# Altium PCB ESCBackerBoard.PcbDoc
Units mil, origin at the board's own origin, x right, y up, seen from the top; angles counter-clockwise.
Board outline 5998.11 x 4000 mil, 2 copper layers (Top Layer, Bottom Layer); 29 components, 6 nets, 287 pads, 62 vias.
Unrouted connection lines stored in the file: 146.
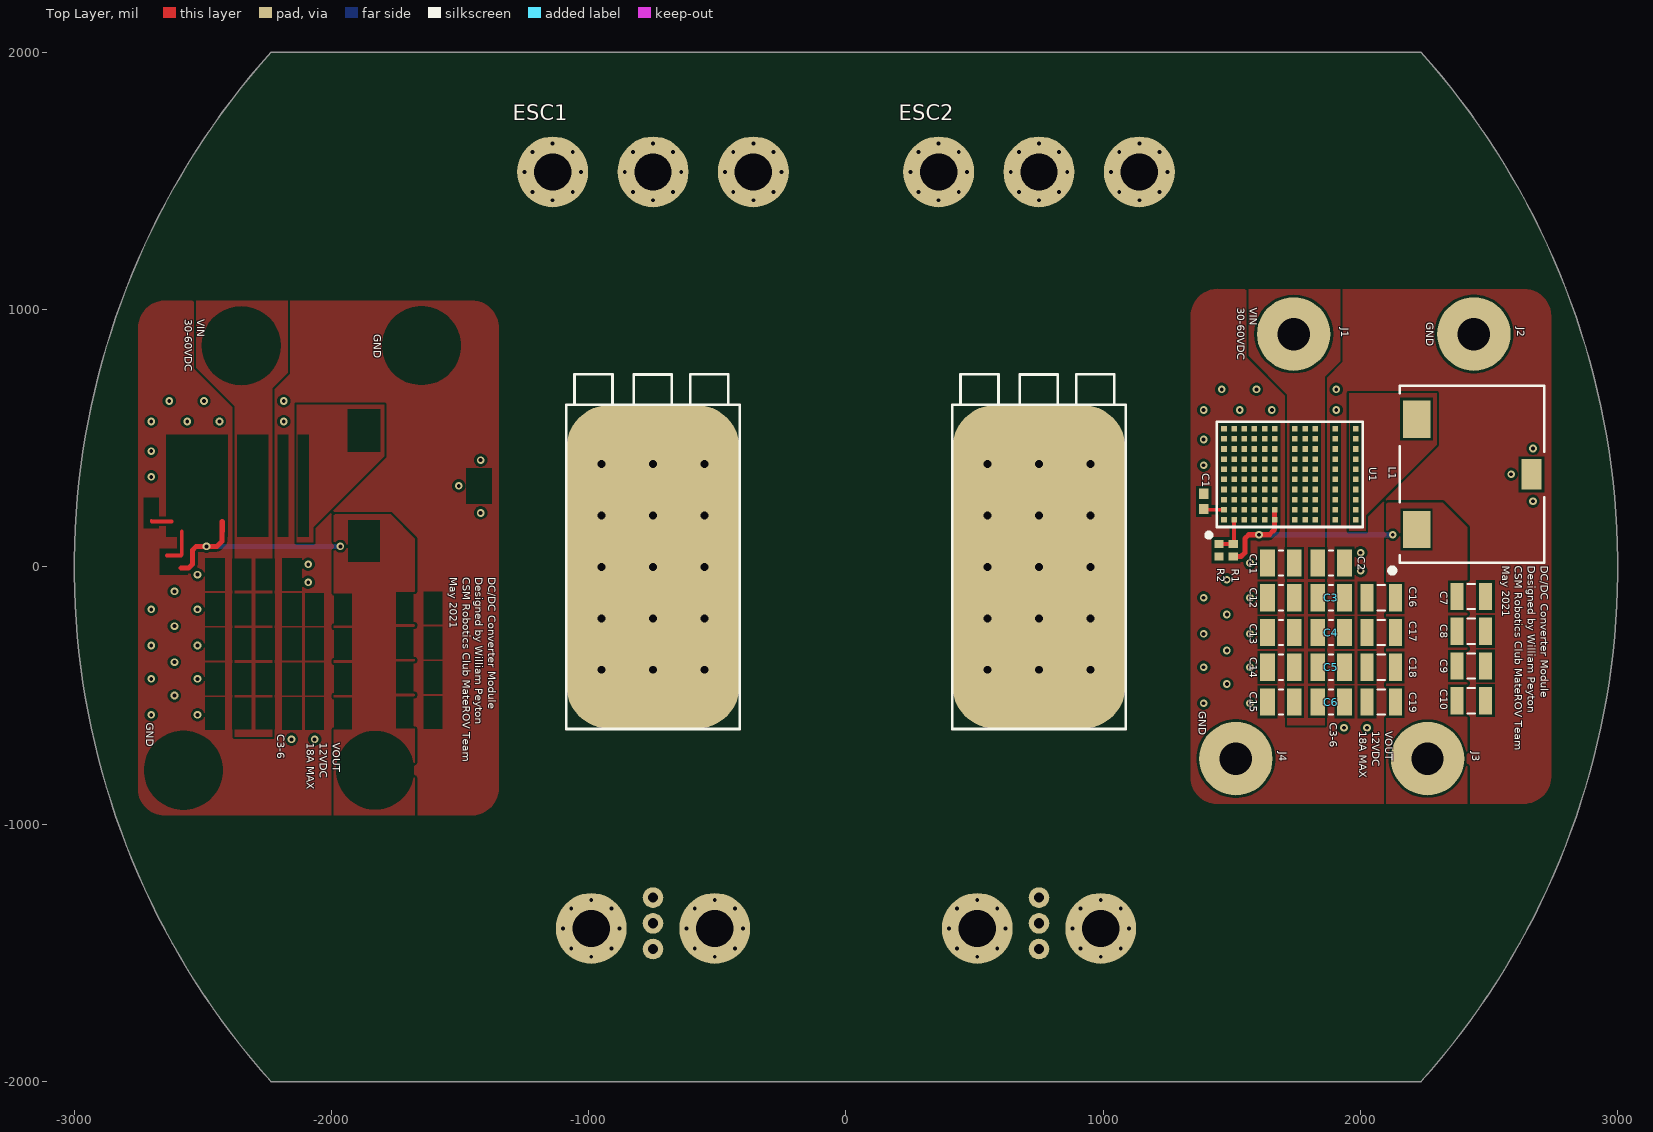
[diagram p0: Top Layer view]
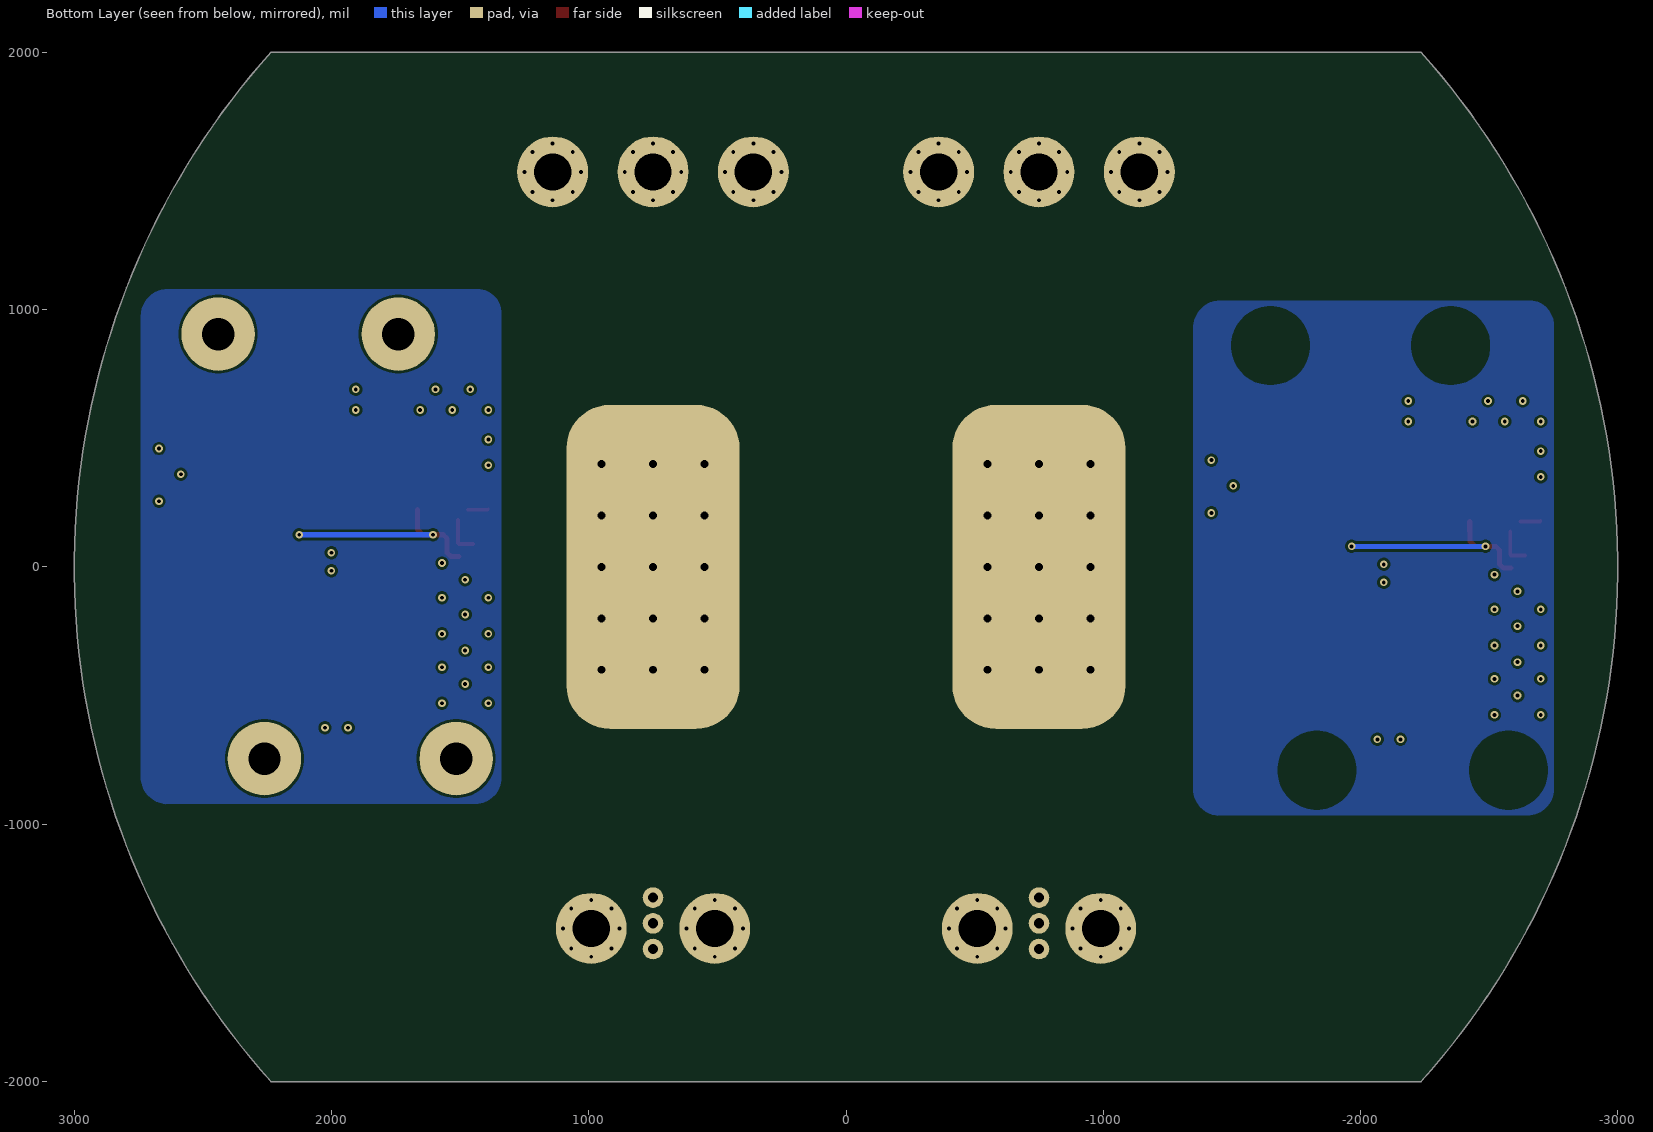
[diagram p1: Bottom Layer view, seen from below]

## Layer stack, top to bottom
Top Solder: solder mask 0.4, Solder Resist, Dk 3.5
Top Layer: signal copper 1.4
Dielectric 1: dielectric 12.6, FR-4, Dk 4.8
Bottom Layer: signal copper 1.4
Bottom Solder: solder mask 0.4, Solder Resist, Dk 3.5

## Board outline
-2235,-2000 cw(c0,0) -2235,2000 2235,2000 cw(c0,0) 2235,-2000

## Design rules (kind name [scope] priority, off if disabled: settings)
Clearance [All] p1: gap=10 ignorepadtopadclearanceinfootprint=FALSE except(0: Arc-Hole Track-Hole SMDPad-Hole THPad-Hole Via-Hole Fill-Hole Poly-Hole Region-Hole Text-Hole)
PolygonConnect [All] p1: connectstyle=Relief reliefconductorwidth=10 reliefentries=4 polygonreliefangle="90 Angle" airgapwidth=10
RoutingVias [All] p1: holewidth=28 width=50 viastyle="Through Hole" minholewidth=28 minwidth=50 maxholewidth=28 maxwidth=50
SolderMaskExpansion [All] p1: expansion=4 istentingtop=FALSE
Width [All] p1: maxlimit=10 minlimit=10 preferedwidth=10
30 further rules are at their usual default settings.

## Classes and differential pairs
component class Top: ESC1 ESC2
component class DC/DC2: C1 C2 C3 C4 C5 C6 C7 C8 C9 C10 C11 C12 C13 C14 C15 C16 C17 C18 C19 J1 J2 J3 J4 L1 R1 R2 U1

## Components (designator, comment, footprint, x,y, rotation, side; value= is the part's Value field where it differs from the comment)
C1 "4.7nF 100V" "C1608 Generic" 1390,255 r90 top
C2 "2.2uF 100V" HMK325B7225MM-P 1885,15 r0 top
C3 "2.2uF 100V" HMK325B7225MM-P 1885,-120 r0 top
C4 "2.2uF 100V" HMK325B7225MM-P 1885,-255 r0 top
C5 "2.2uF 100V" HMK325B7225MM-P 1885,-390 r0 top
C6 "2.2uF 100V" HMK325B7225MM-P 1885,-525 r0 top
C7 "10uF 25V" C1210C106M3RACTU 2430,-115 r180 top
C8 "10uF 25V" C1210C106M3RACTU 2430,-250 r180 top
C9 "10uF 25V" C1210C106M3RACTU 2430,-385 r180 top
C10 "10uF 25V" C1210C106M3RACTU 2430,-520 r180 top
C11 "2.2uF 100V" HMK325B7225MM-P 1690,15 r180 top
C12 "2.2uF 100V" HMK325B7225MM-P 1690,-120 r180 top
C13 "2.2uF 100V" HMK325B7225MM-P 1690,-255 r180 top
C14 "2.2uF 100V" HMK325B7225MM-P 1690,-390 r180 top
C15 "2.2uF 100V" HMK325B7225MM-P 1690,-525 r180 top
C16 "10uF 25V" C1210C106M3RACTU 2080,-120 r0 top
C17 "10uF 25V" C1210C106M3RACTU 2080,-255 r0 top
C18 "10uF 25V" C1210C106M3RACTU 2080,-390 r0 top
C19 "10uF 25V" C1210C106M3RACTU 2080,-525 r0 top
ESC1 "7-26V 30A" BasicESC -750,0 r90 top
ESC2 "7-26V 30A" BasicESC 750,0 r90 top
J1 "=Value" M3-Bolt-Down#1 1790,905 r270 top
J2 "=Value" M3-Bolt-Down#2 2355,905 r270 top
J3 "=Value" M3-Bolt-Down#3 2310,-1000 r270 top
J4 "=Value" M3-Bolt-Down#4 1795,-1025 r270 top
L1 "480nH" PA5120.481NLT 2625,360 r90 top
R1 "11.1kΩ" "RNCF0603 Generic" 1505,65 r90 top
R2 "1kΩ" "RNCF0603 Generic" 1450,65 r90 top
U1 "12V 18A" PI3526-00-LGIZ 1725,360 r90 top

## Footprints (in the part's own frame and the unit in brackets; to place one, negate y for a bottom-side part, rotate by r counter-clockwise, add the part's x,y. Pads: shape width x height; smd on the part's side, far side on the other; paste and mask are expansions set on the pad)
BasicESC [mil]
  round 60 hole 30 paste+0 mask+0: 1(-400,-200) 1(-400,0) 1(-400,200) 1(-200,-200) 1(-200,0) 1(-200,200) 1(0,200) 1(0,0) 1(0,-200) 1(200,-200) 1(200,0) 1(200,200) 1(400,-200) 1(400,0) 1(400,200)
  rrect50% 1259.84x673.23 all layers, no hole: 1(0,0)
  round 80 hole 40: 2(-1385,0) GND(-1285,0) SIG(-1485,0)
  round 30 hole 15 paste+0 mask+0: A(1425,-390) A(1457,-468) A(1457,-312) A(1535,-500) A(1535,-280) A(1613,-468) A(1613,-312) A(1645,-390) B(1425,0) B(1457,-78) B(1457,78) B(1535,-110) B(1535,110) B(1613,-78) B(1613,78) B(1645,0) C(1425,390) C(1457,312) C(1457,468) C(1535,280) C(1535,500) C(1613,312) C(1613,468) C(1645,390) GND(-1515,-240) GND(-1483,-318) GND(-1483,-162) GND(-1405,-350) GND(-1405,-130) GND(-1327,-318) GND(-1327,-162) GND(-1295,-240) VIN(-1515,240) VIN(-1483,162) VIN(-1483,318) VIN(-1405,130) VIN(-1405,350) VIN(-1327,162) VIN(-1327,318) VIN(-1295,240)
  round 275.59 hole 144.88: A(1535,-390) B(1535,0) C(1535,390) GND(-1405,-240) VIN(-1405,240)
  silkscreen extent -630,-337 748,337, body extent -1535,-533 1675,533, height 336
C1210C106M3RACTU [mm] "KEMET CAP CER 10UF 25V X7R 1210"
  rect 1.3x2.7 smd: 1(-1.4,0) 2(1.4,0)
  silkscreen extent -0.35,-1.25 0.35,1.25, body extent -1.7,-1.35 1.7,1.35, height 1.25
"C1608 Generic" [mm]
  rect 1x0.95 smd: 1(-0.75,0) 2(0.75,0)
  body extent -0.85,-0.45 0.85,0.45, height 0.9
HMK325B7225MM-P [mm] "Taiyo Yuden CAP CER 2.2UF 100V X7R 1210"
  rect 1.45x2.7 smd: 1(-1.325,0) 2(1.325,0)
  silkscreen extent -0.2,-1.25 0.2,1.25, body extent -1.7,-1.35 1.7,1.35, height 2.5
M3-Bolt-Down#1 [mm]
  round 7.25 hole 3.2: 1(0,-1.27)
M3-Bolt-Down#2 [mm]
  round 7.25 hole 3.2: 1(0,2.159)
M3-Bolt-Down#3 [mm]
  round 7.25 hole 3.2: 1(-6.477,-1.27)
M3-Bolt-Down#4 [mm]
  round 7.25 hole 3.2: 1(-7.112,-7.112)
PA5120.481NLT [mm] "Pulse FIXED IND 480NH 32A 1.7MOHM SMD"
  rect 3.7x2.7 smd: 1(-5.45,10.35) 2(5.45,10.35)
  rect 3x2 smd: 3(0,-1)
  silkscreen extent -9.75,-2.25 8.75,13, body extent -8.65,-2.15 8.65,11.85, height 6.5
PI3526-00-LGIZ [mm] "Vicor Power DC DC CONVERTER 12V 18A"
  rect 0.55x0.55 smd: A1(-4.5,6.5) A2(-4.5,5.5) A3(-4.5,4.5) A4(-4.5,3.5) A5(-4.5,2.5) B1(-3.5,6.5) BLOCK1(-4.5,-6.5) BLOCK1(-3.5,-6.5) BLOCK1(-2.5,-6.5) BLOCK1(-1.5,-6.5) BLOCK1(-0.5,-6.5) BLOCK1(0.5,-6.5) BLOCK1(1.5,-6.5) BLOCK1(2.5,-6.5) BLOCK1(3.5,-6.5) BLOCK1(4.5,-6.5) BLOCK2(-4.5,-4.5) BLOCK2(-3.5,-4.5) BLOCK2(-3.5,2.5) BLOCK2(-2.5,3.5) BLOCK2(-2.5,1.5) BLOCK2(-2.5,2.5) BLOCK2(-2.5,-4.5) BLOCK2(-1.5,1.5) BLOCK2(-1.5,2.5) BLOCK2(-1.5,3.5) BLOCK2(-1.5,-4.5) BLOCK2(-0.5,2.5) BLOCK2(-0.5,3.5) BLOCK2(-0.5,1.5) BLOCK2(-0.5,-4.5) BLOCK2(0.5,5.5) BLOCK2(0.5,4.5) BLOCK2(0.5,2.5) BLOCK2(0.5,3.5) BLOCK2(0.5,1.5) BLOCK2(0.5,-4.5) BLOCK2(1.5,4.5) BLOCK2(1.5,5.5) BLOCK2(1.5,1.5) BLOCK2(1.5,2.5) BLOCK2(1.5,3.5) BLOCK2(1.5,-4.5) BLOCK2(2.5,3.5) BLOCK2(2.5,4.5) BLOCK2(2.5,5.5) BLOCK2(2.5,1.5) BLOCK2(2.5,2.5) BLOCK2(2.5,-4.5) BLOCK2(3.5,-4.5) BLOCK2(3.5,1.5) BLOCK2(3.5,2.5) BLOCK2(3.5,3.5) BLOCK2(3.5,4.5) BLOCK2(3.5,5.5) BLOCK2(4.5,-4.5) BLOCK2(4.5,1.5) BLOCK3(-4.5,-2.5) BLOCK3(-4.5,-1.5) BLOCK3(-4.5,-0.5) BLOCK3(-3.5,-2.5) BLOCK3(-3.5,-1.5) BLOCK3(-3.5,-0.5) BLOCK3(-2.5,-2.5) BLOCK3(-2.5,-1.5) BLOCK3(-2.5,-0.5) BLOCK3(-1.5,-0.5) BLOCK3(-1.5,-2.5) BLOCK3(-1.5,-1.5) BLOCK3(-0.5,-0.5) BLOCK3(-0.5,-1.5) BLOCK3(-0.5,-2.5) BLOCK3(0.5,-0.5) BLOCK3(0.5,-1.5) BLOCK3(0.5,-2.5) BLOCK3(1.5,-0.5) BLOCK3(1.5,-2.5) BLOCK3(1.5,-1.5) BLOCK3(2.5,-2.5) BLOCK3(2.5,-1.5) BLOCK3(2.5,-0.5) BLOCK3(3.5,-2.5) BLOCK3(3.5,-1.5) BLOCK3(3.5,-0.5) BLOCK3(4.5,-2.5) BLOCK3(4.5,-1.5) BLOCK3(4.5,-0.5) BLOCK4(-4.5,1.5) BLOCK4(-3.5,1.5) BLOCK5(-3.5,3.5) BLOCK5(-3.5,4.5) BLOCK5(-3.5,5.5) BLOCK5(-2.5,4.5) BLOCK5(-2.5,5.5) BLOCK5(-1.5,4.5) BLOCK5(-1.5,5.5) BLOCK5(-1.5,6.5) BLOCK5(-0.5,5.5) BLOCK5(-0.5,4.5) C1(-2.5,6.5) E1(-0.5,6.5) F1(0.5,6.5) G1(1.5,6.5) H1(2.5,6.5) J1(3.5,6.5) K1(4.5,6.5) K2(4.5,5.5) K3(4.5,4.5) K4(4.5,3.5) K5(4.5,2.5)
  silkscreen extent -6.2,-7.2 5.2,8.2, body extent -5.05,-7.05 5.05,7.25, height 2.63
"RNCF0603 Generic" [mm] "Stackpole RES"
  rect 0.8x0.9 smd: 1(-0.625,0) 2(0.625,0)
  body extent -0.82,-0.45 0.82,0.45, height 0.55

## Part data
C1: library part C1608C0G2A472J080AC, "TDK CAP CER 4700PF 100V C0G 0603", Manufacturer="TDK Corporation", ComponentLink1Description=DigiKey, ComponentLink1URL=https://www.digikey.com/en/products/detail/tdk-corporation/C1608C0G2A472J080AC/5023335, Part Number=C1608C0G2A472J080AC
C2 C3 C4 C5 C6 C11 C12 C13 C14 C15: library part HMK325B7225MM-P, "Taiyo Yuden CAP CER 2.2UF 100V X7R 1210", Manufacturer="Taiyo Yuden", ComponentLink1Description=DigiKey, ComponentLink1URL=https://www.digikey.com/en/products/detail/taiyo-yuden/HMK325B7225MM-P/7065949, Part Number=HMK325B7225MM-P
C7 C8 C9 C10 C16 C17 C18 C19: library part C1210C106M3RACTU, "KEMET CAP CER 10UF 25V X7R 1210", Manufacturer=KEMET, ComponentLink1Description=DigiKey, ComponentLink1URL=https://www.digikey.com/en/products/detail/kemet/C1210C106M3RACTU/2216507, Part Number=C1210C106M3RACTU
ESC1 ESC2: library part BasicESC, "Blue Robotics BasicESC", Manufacturer="Blue Robotics", ComponentLink1Description="Blue Robotics", ComponentLink1URL=https://bluerobotics.com/store/thrusters/speed-controllers/besc30-r3/
J1 J2 J3 J4: library part M3-Bolt-Down, "Generic bolt-down mount w/exposed copper pad"
L1: library part PA5120.481NLT, "Pulse FIXED IND 480NH 32A 1.7MOHM SMD", Manufacturer="Pulse Electronics Power", ComponentLink1Description=DigiKey, ComponentLink1URL=https://www.digikey.com/en/products/detail/pulse-electronics-power/PA5120-481NLT/13236345, Part Number=PA5120.481NLT
R1: library part RNCF0603BTE11K1, "Stackpole RES 11.1K OHM 0.1% 1/10W 0603", Manufacturer="Stackpole Electronics Inc", ComponentLink1Description=DigiKey, ComponentLink1URL=https://www.digikey.com/en/products/detail/stackpole-electronics-inc/RNCF0603BTE11K1/3198128, Part Number=RNCF0603BTE11K1
R2: library part RNCF0603TKY1K00, "Stackpole RES 1K OHM 0.01% 1/10W 0603", Manufacturer="Stackpole Electronics Inc", ComponentLink1Description=DigiKey, ComponentLink1URL=https://www.digikey.com/en/products/detail/stackpole-electronics-inc/RNCF0603TKY1K00/2269697, Part Number=RNCF0603TKY1K00
U1: library part PI3526-00-LGIZ, "Vicor DC DC CONVERTER 12V 18A", Manufacturer="Vicor Corporation", ComponentLink1Description=DigiKey, ComponentLink1URL=https://www.digikey.com/en/products/detail/vicor-corporation/PI3526-00-LGIZ/7319725, ComponentLink2Description=Datasheet, ComponentLink2URL=http://www.vicorpower.com/documents/datasheets/ds_PI352x-00.pdf, Part Number=PI3526-00-LGIZ

## Via types
v1: diameter 30, hole 15, Top Layer to Bottom Layer, 62 vias

## Nets (pads, with @x,y where several pads share a name; then routed paths per layer and width w, separated by ;. In a path a pad name is that pad's centre, name@x,y a point inside that pad or via, vN(x,y) a via of type N, cw(c..) or ccw(c..) an arc to the next point about the centre after c; other vN are vias at no path point)
COMP: C1.1 U1.B1 | length 80.4
  Top Layer w10: C1.1 C1.1@1393.27,222.2
  Top Layer w15: C1.1@1393.27,222.2 U1.B1
EAIN: R1.2 R2.2 U1.A2 | length 149.7
  Top Layer w10: R1.2 R1.2@1508.46,93.07
  Top Layer w15: R2.2 R1.2 ; R1.2@1508.46,93.07 U1.A2
GND: C1.2 C2.2 C3.2 C4.2 C5.2 C6.2 C7.1 C8.1 C9.1 C10.1 C11.2 C12.2 C13.2 C14.2 C15.2 C16.1 C17.1 C18.1 C19.1 ESC1.GND ESC2.GND J2.1 J4.1 L1.3 R2.1 U1.A5 U1.BLOCK2 U1.BLOCK5 U1.E1 U1.H1 U1.J1 U1.K1 U1.K2 U1.K4
VIN: C2.1 C3.1 C4.1 C5.1 C6.1 C11.1 C12.1 C13.1 C14.1 C15.1 J1.1 U1.BLOCK3
VOUT: C7.2 C8.2 C9.2 C10.2 C16.2 C17.2 C18.2 C19.2 ESC1.VIN ESC2.VIN J3.1 L1.1 R1.1 U1.BLOCK4 | length 833.1
  Top Layer w10: U1.BLOCK4@1665,181.89 U1.BLOCK4@1665.94,182.83
  Top Layer w20: R1.1 1535.39,40.39 1550,55 1550,110 1565,125 v1(1605,125) 1645,125 1665,145 U1.BLOCK4@1665,181.89 ; U1.BLOCK4@1665.94,182.83 U1.BLOCK4@1665.94,222.2
  Bottom Layer w20: v1(1605,125) v1(2125,125)
VS1: L1.2 U1.BLOCK1
pads on no net: ESC1.1 ESC1.2 ESC1.A ESC1.B ESC1.C ESC1.SIG ESC2.1 ESC2.2 ESC2.A ESC2.B ESC2.C ESC2.SIG U1.A1 U1.A3 U1.A4 U1.C1 U1.F1 U1.G1 U1.K3 U1.K5
copper on no net: | length 1063.3
  Top Layer w10: -2700,180.47 -2696.73,177.2 ; -2585,44.61 -2581.54,48.07 ; -2425,136.89 -2424.06,137.83
  Top Layer w15: -2696.73,177.2 -2620.91,177.2 ; -2640,44.61 -2585,44.61 ; -2581.54,48.07 -2581.54,137.83
  Top Layer w20: -2585,-4.61 -2554.61,-4.61 -2540,10 -2540,65 -2525,80 v1(-2485,80) -2445,80 -2425,100 -2425,136.89 ; -2424.06,137.83 -2424.06,177.2
  Bottom Layer w20: v1(-2485,80) v1(-1965,80)
  other v1: -2155,-670 -2065,-670 1935,-625 2025,-625 -2700,-575 -2520,-575 1390,-530 1570,-530 -2610,-500 1480,-455 -2700,-435 -2520,-435 1390,-390 1570,-390 -2610,-370 1480,-325 -2700,-305 -2520,-305 1390,-260 1570,-260 -2610,-230 1480,-185 -2700,-165 -2520,-165 1390,-120 1570,-120 -2610,-95 -2090,-60 1480,-50 -2520,-30 2000,-15 -2090,10 1570,15 2000,55 -1420,210 2670,255 -1505,315 -2700,350 2585,360 1390,395 -1420,415 -2700,450 2670,460 1390,495 -2700,565 -2560,565 -2435,565 -2185,565 1390,610 1530,610 1655,610 1905,610 -2630,645 -2495,645 -2185,645 1460,690 1595,690 1905,690

## Polygon pours and split planes (outlines as drawn)
no net on Top Layer "NONET_L-01_P-001" (solid, pour order 13): -1350,935 -1350,-865 cw(c-1455,-860) -1450,-965 -2650,-965 cw(c-2650,-865) -2750,-865 -2750,935 cw(c-2645,930) -2650,1035 -1450,1035 cw(c-1455,930)
no net on Top Layer "Top Layer-VIN" (solid, pour order 12): -2375,625 -2375,-660 -2230,-660 -2230,695 -2170,755 -2170,1035 -2525,1035 -2525,775
no net on Top Layer "NONET_L-01_P-001" (solid, pour order 11): -1990,-965 -1990,200 -1985,205 -1770,205 -1675,110 -1675,-965
no net on Top Layer "NONET_L-01_P-001" (solid, pour order 10): -2135,95 -2070,95 -2070,155 -1795,430 -1795,630 -2135,630
no net on Top Layer "NONET_L-01_P-001" (solid, pour order 8): 2740,980 2740,-820 cw(c2635,-815) 2640,-920 1440,-920 cw(c1440,-820) 1340,-820 1340,980 cw(c1445,975) 1440,1080 2640,1080 cw(c2635,975)
no net on Top Layer "Top Layer-VIN" (solid, pour order 7): 1715,670 1715,-615 1860,-615 1860,740 1920,800 1920,1080 1565,1080 1565,820
no net on Top Layer "NONET_L-01_P-001" (solid, pour order 6): 2100,-920 2100,245 2105,250 2320,250 2415,155 2415,-920
no net on Top Layer "NONET_L-01_P-001" (solid, pour order 5): 1955,140 2020,140 2020,200 2295,475 2295,675 1955,675
no net on Bottom Layer "NONET_L-01_P-001" (solid, pour order 14): -1350,935 -1350,-865 cw(c-1454.17,-862.5) -1450,-965 -2650,-965 cw(c-2650,-864.36) -2750,-865 -2750,935 cw(c-2655,940) -2650,1035 -1450,1035 cw(c-1455,930)
no net on Bottom Layer "NONET_L-01_P-001" (solid, pour order 9): 2740,980 2740,-820 cw(c2635.83,-817.5) 2640,-920 1440,-920 cw(c1440,-819.36) 1340,-820 1340,980 cw(c1435,985) 1440,1080 2640,1080 cw(c2635,975)

## Silkscreen, mask and mechanical layers (free items; w line width, h text height)
Top Overlay:
  text "VIN / 30-60VDC" at 1510,1007.43 h50 r270
  text "VIN / 30-60VDC" at -2580,962.43 h50 r270
  text "GND" at 2245.53,950 h50 r270
  text "GND" at -1844.47,905 h50 r270
  text "DC/DC Converter Module / Designed by William Peyton / CSM Robotics Club MateROV Team / May 2021" at 2540,4.67 h50 r270
  text "DC/DC Converter Module / Designed by William Peyton / CSM Robotics Club MateROV Team / May 2021" at -1550,-40.33 h50 r270
  text "GND" at 1360.53,-560 h50 r270
  text "GND" at -2729.47,-605 h50 r270
  text "C3-6" at 1870.58,-605 h50 r270
  text "VOUT / 12VDC / 18A MAX" at 1985,-638.17 h50 r270
  text "C3-6" at -2219.42,-650 h50 r270
  text "VOUT / 12VDC / 18A MAX" at -2105,-683.17 h50 r270
Mechanical 1:
  lines w10: -2750,-865.14 -2750,935 cw(c-2650,935) -2650,1035 -1450,1035 cw(c-1450,935) -1350,935 -1350,-865 cw(c-1450,-865) -1450,-965 -2650.14,-965 ; -2750,-865 ccw(c-2650,-865) -2650,-965 ; 1340,-820.14 1340,980 cw(c1440,980) 1440,1080 2640,1080 cw(c2640,980) 2740,980 2740,-820 cw(c2640,-820) 2640,-920 1439.86,-920 ; 1340,-820 ccw(c1440,-820) 1440,-920 ; -2235,-2000 cw(c0,0) -2235,2000 2235,2000 cw(c0,0) 2235,-2000 -2235,-2000